# Altium PCB SupplyBox.PcbDoc
Units mil, origin at the board's own origin, x right, y up, seen from the top; angles counter-clockwise.
Board outline 6000 x 4000 mil, 2 copper layers (Top Layer, Bottom Layer); 8 components, 0 nets, 193 pads, 0 vias.
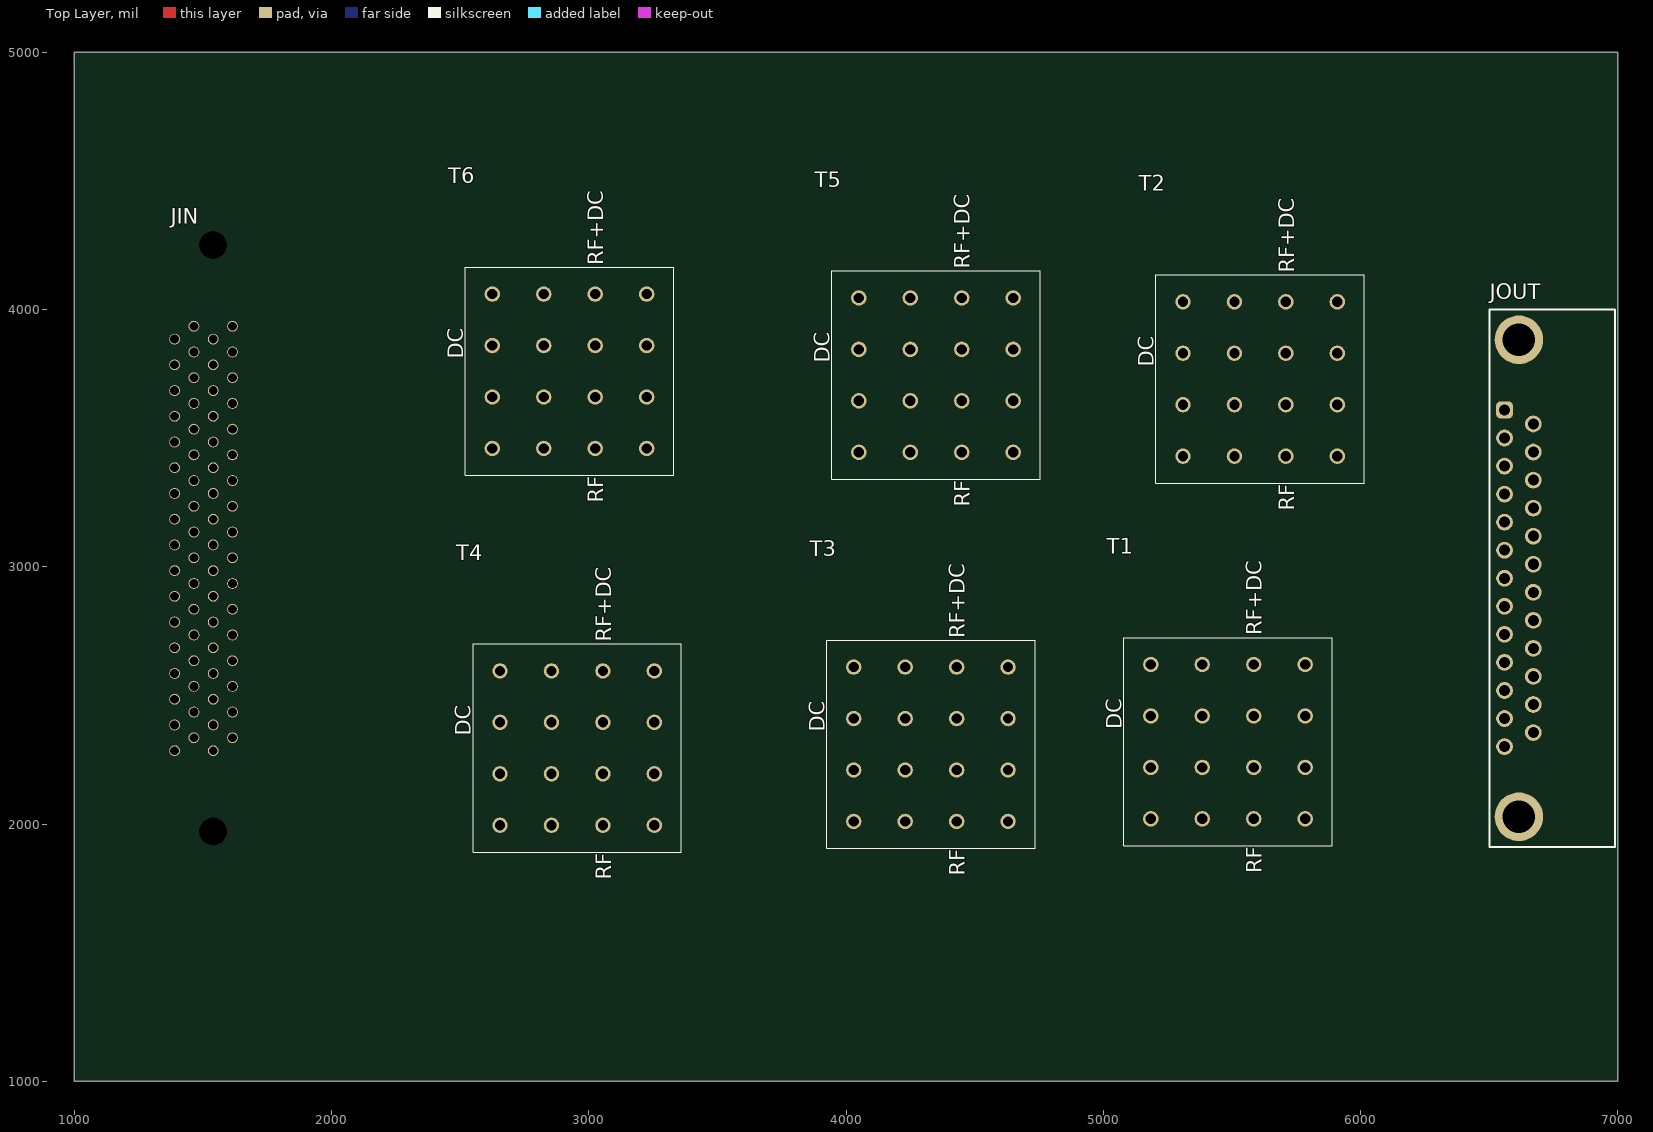
[diagram p0: Top Layer view]
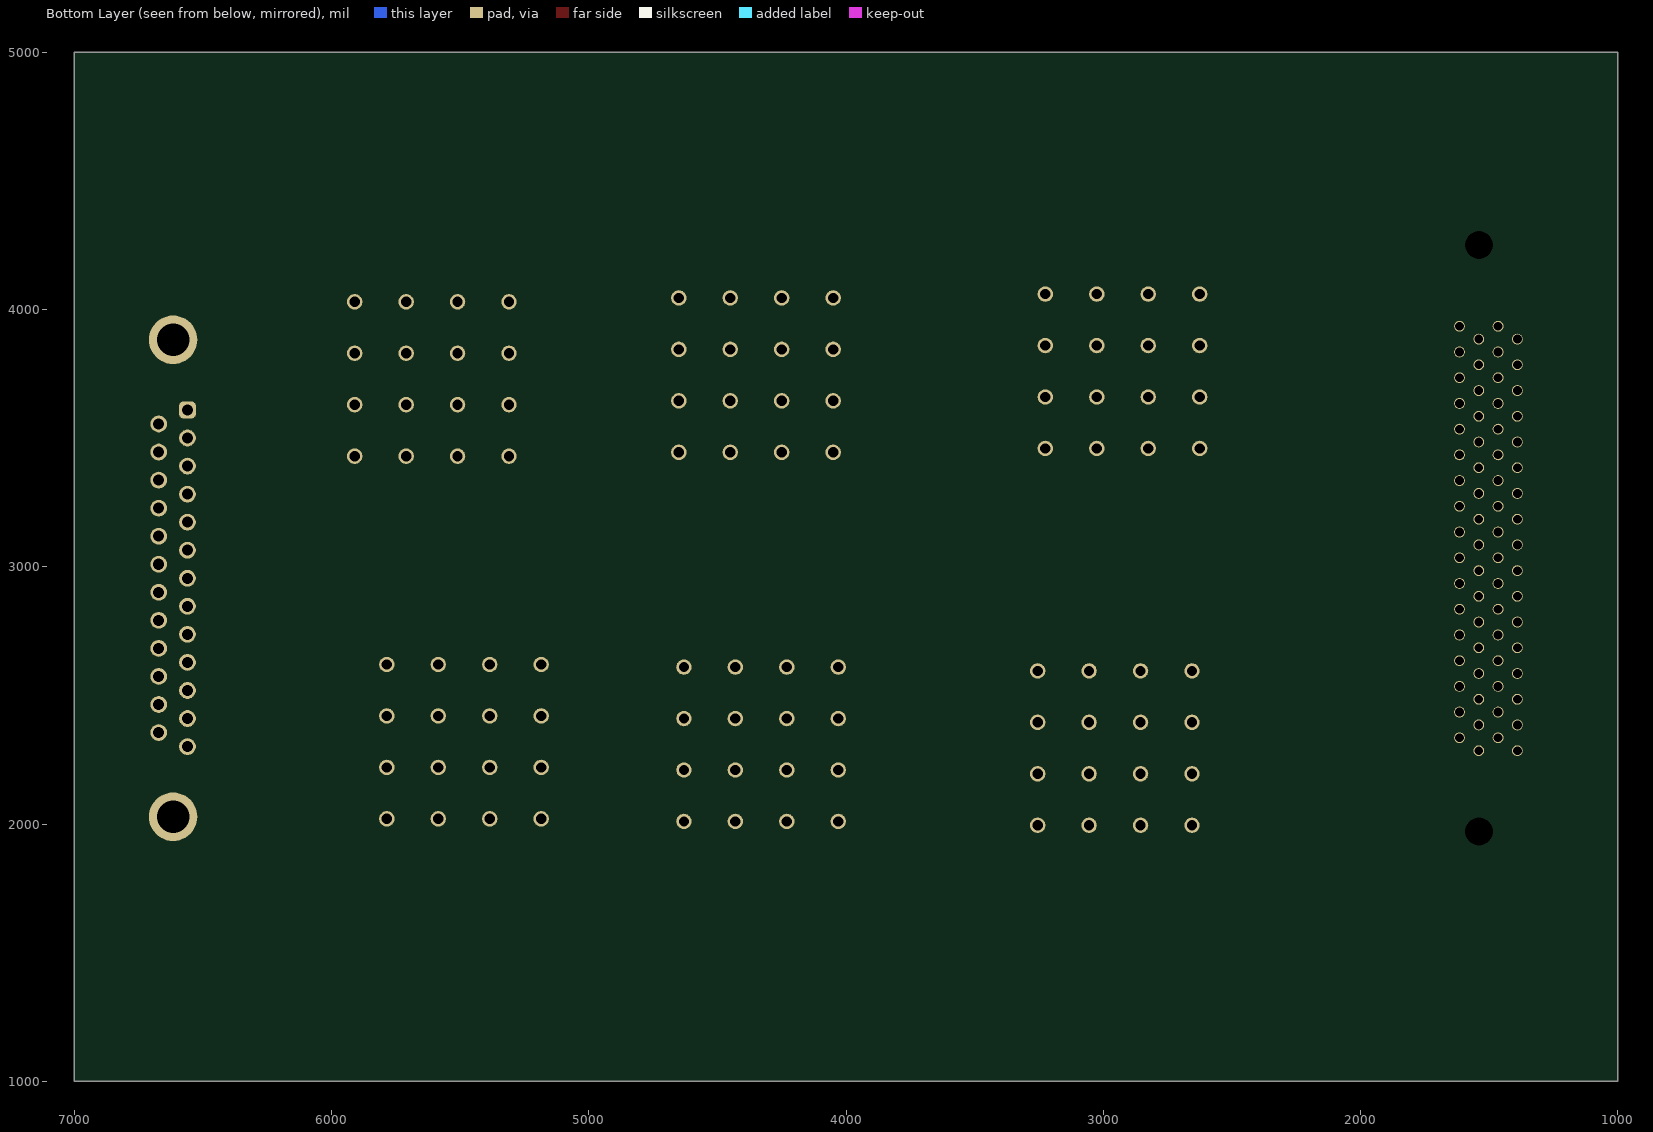
[diagram p1: Bottom Layer view, seen from below]

## Layer stack, top to bottom
Top Solder: solder mask 0.4, Solder Resist, Dk 3.5
Top Layer: signal copper 1.4
Dielectric 1: dielectric 12.6, FR-4, Dk 4.8
Bottom Layer: signal copper 1.4
Bottom Solder: solder mask 0.4, Solder Resist, Dk 3.5

## Board outline
1000,1000 7000,1000 7000,5000 1000,5000

## Design rules (kind name [scope] priority, off if disabled: settings)
Clearance [All] p1: gap=10 ignorepadtopadclearanceinfootprint=FALSE
PolygonConnect [All] p1: connectstyle=Relief reliefconductorwidth=10 reliefentries=4 polygonreliefangle="90 Angle" airgapwidth=10
RoutingVias [All] p1: holewidth=28 width=50 viastyle="Through Hole" minholewidth=28 minwidth=50 maxholewidth=28 maxwidth=50
SolderMaskExpansion [All] p1: expansion=4 istentingtop=FALSE
Width [All] p1: maxlimit=10 minlimit=10 preferedwidth=10
30 further rules are at their usual default settings.

## Components (designator, comment, footprint, x,y, rotation, side; value= is the part's Value field where it differs from the comment)
JIN "1761028-4" 1761028-4-Footprint-1 1465,3935 r90 top
JOUT "618025231121" 618025231121 6745.83,2955.28 r90 top
T1 "PBTC-1GW+" PBTC-1GW+ 5485,2320 r90 top
T2 "PBTC-1GW+" PBTC-1GW+ 5610,3730 r90 top
T3 "PBTC-1GW+" PBTC-1GW+ 4330,2310 r90 top
T4 "PBTC-1GW+" PBTC-1GW+ 2955,2295 r90 top
T5 "PBTC-1GW+" PBTC-1GW+ 4350,3745 r90 top
T6 "PBTC-1GW+" PBTC-1GW+ 2925,3760 r90 top

## Footprints (in the part's own frame and the unit in brackets; to place one, negate y for a bottom-side part, rotate by r counter-clockwise, add the part's x,y. Pads: shape width x height; smd on the part's side, far side on the other; paste and mask are expansions set on the pad)
1761028-4-Footprint-1 [mil]
  round 42 hole 34: 1(0,0) 2(-50,75) 3(-100,0) 4(-150,75) 5(-200,0) 6(-250,75) 7(-300,0) 8(-350,75) 9(-400,0) 10(-450,75) 11(-500,0) 12(-550,75) 13(-600,0) 14(-650,75) 15(-700,0) 16(-750,75) 17(-800,0) 18(-850,75) 19(-900,0) 20(-950,75) 21(-1000,0) 22(-1050,75) 23(-1100,0) 24(-1150,75) 25(-1200,0) 26(-1250,75) 27(-1300,0) 28(-1350,75) 29(-1400,0) 30(-1450,75) 31(-1500,0) 32(-1550,75) 33(-1600,0) 34(-1650,75) 35(0,-150) 36(-50,-75) 37(-100,-150) 38(-150,-75) 39(-200,-150) 40(-250,-75) 41(-300,-150) 42(-350,-75) 43(-400,-150) 44(-450,-75) 45(-500,-150) 46(-550,-75) 47(-600,-150) 48(-650,-75) 49(-700,-150) 50(-750,-75) 51(-800,-150) 52(-850,-75) 53(-900,-150) 54(-950,-75) 55(-1000,-150) 56(-1050,-75) 57(-1100,-150) 58(-1150,-75) 59(-1200,-150) 60(-1250,-75) 61(-1300,-150) 62(-1350,-75) 63(-1400,-150) 64(-1450,-75) 65(-1500,-150) 66(-1550,-75) 67(-1600,-150) 68(-1650,-75)
  round 100 hole 109 unplated: M1(315,-75) M2(-1965,-75)
618025231121 [mm] "25 pins, right angled, 8.08mm, with hex screw"
  rrect50% 1.65x1.65 hole 1.09: 1(16.62,4.72)
  round 1.65 hole 1.09: 2(13.85,4.72) 3(11.08,4.72) 4(8.31,4.72) 5(5.54,4.72) 6(2.77,4.72) 7(0,4.72) 8(-2.77,4.72) 9(-5.54,4.72) 10(-8.31,4.72) 11(-11.08,4.72) 12(-13.85,4.72) 13(-16.62,4.72) 14(15.235,1.88) 15(12.465,1.88) 16(9.695,1.88) 17(6.925,1.88) 18(4.155,1.88) 19(1.385,1.88) 20(-1.385,1.88) 21(-4.155,1.88) 22(-6.925,1.88) 23(-9.695,1.88) 24(-12.465,1.88) 25(-15.235,1.88)
  round 4.8 hole 3.2: M1(-23.55,3.3) M2(23.55,3.3)
  silkscreen extent -26.55,-6.2 26.55,6.2, body extent -26.55,-12.2 26.55,6.2, height 12.55
PBTC-1GW+ [mil] "Mini-Circuits Bias-Tee"
  round 60 hole 40: 1(-300,300) 2(-100,300) 3(100,300) 4(300,300) 5(-300,100) 6(-100,100) 7(100,100) 8(300,100) 9(-300,-100) 10(-100,-100) 11(100,-100) 12(300,-100) 13(-300,-300) 14(-100,-300) 15(100,-300) 16(300,-300)
  silkscreen extent -405,-405 405,405

## Part data
JIN: library part CMP-002-00071-1, "Telecom and Datacom Connector, 68 Contact(s), Female, Right Angle, Solder Terminal, #2-56, Receptacle", Max Operating Temperature=105°C, Min Operating Temperature=-55°C, Connector Type="TELECOM AND DATACOM CONNECTOR", Mounting Technology=Panel,Board, RoHS Compliant=Yes
JOUT: library part CMP-1502-00202-2, Contact Resistance=30mΩ, Current Rating=3A, Insulation Resistance=5GΩ, Max Operating Temperature=105°C, Min Operating Temperature=-55°C, Operating Supply Voltage=125V, Contact Plating=Gold, Depth=18.5mm, Gender=Female, Housing Material=Steel, Insulation Material=PBT, Length=38.33mm, Mount="Through Hole", NexarPartId=18818207, Number of Contacts=25, Number of Pins=25, Number of Rows=2, Orientation="Right Angle", Pitch=2.77mm, REACH SVHC=Unknown, RoHS=Compliant, Termination=SMD/SMT, Voltage Rating=125V, Width=12.5mm
T1 T2 T3 T4 T5 T6: library part CMP-00025-00003-1, "Monitor TEE DC Block, 0.1MHz Min, 1000MHz Max, 1dB Insertion Loss-Max", Max Operating Temperature=100°C, Min Operating Temperature=-55°C, RoHS Compliant=Yes

## Nets (pads, with @x,y where several pads share a name; then routed paths per layer and width w, separated by ;. In a path a pad name is that pad's centre, name@x,y a point inside that pad or via, vN(x,y) a via of type N, cw(c..) or ccw(c..) an arc to the next point about the centre after c; other vN are vias at no path point)
pads on no net: JIN.1 JIN.2 JIN.3 JIN.4 JIN.5 JIN.6 JIN.7 JIN.8 JIN.9 JIN.10 JIN.11 JIN.12 JIN.13 JIN.14 JIN.15 JIN.16 JIN.17 JIN.18 JIN.19 JIN.20 JIN.21 JIN.22 JIN.23 JIN.24 JIN.25 JIN.26 JIN.27 JIN.28 JIN.29 JIN.30 JIN.31 JIN.32 JIN.33 JIN.34 JIN.35 JIN.36 JIN.37 JIN.38 JIN.39 JIN.40 JIN.41 JIN.42 JIN.43 JIN.44 JIN.45 JIN.46 JIN.47 JIN.48 JIN.49 JIN.50 JIN.51 JIN.52 JIN.53 JIN.54 JIN.55 JIN.56 JIN.57 JIN.58 JIN.59 JIN.60 JIN.61 JIN.62 JIN.63 JIN.64 JIN.65 JIN.66 JIN.67 JIN.68 JIN.M1 JIN.M2 JOUT.1 JOUT.2 JOUT.3 JOUT.4 JOUT.5 JOUT.6 JOUT.7 JOUT.8 JOUT.9 JOUT.10 JOUT.11 JOUT.12 JOUT.13 JOUT.14 JOUT.15 JOUT.16 JOUT.17 JOUT.18 JOUT.19 JOUT.20 JOUT.21 JOUT.22 JOUT.23 JOUT.24 JOUT.25 JOUT.M1 JOUT.M2 T1.1 T1.2 T1.3 T1.4 T1.5 T1.6 T1.7 T1.8 T1.9 T1.10 T1.11 T1.12 T1.13 T1.14 T1.15 T1.16 T2.1 T2.2 T2.3 T2.4 T2.5 T2.6 T2.7 T2.8 T2.9 T2.10 T2.11 T2.12 T2.13 T2.14 T2.15 T2.16 T3.1 T3.2 T3.3 T3.4 T3.5 T3.6 T3.7 T3.8 T3.9 T3.10 T3.11 T3.12 T3.13 T3.14 T3.15 T3.16 T4.1 T4.2 T4.3 T4.4 T4.5 T4.6 T4.7 T4.8 T4.9 T4.10 T4.11 T4.12 T4.13 T4.14 T4.15 T4.16 T5.1 T5.2 T5.3 T5.4 T5.5 T5.6 T5.7 T5.8 T5.9 T5.10 T5.11 T5.12 T5.13 T5.14 T5.15 T5.16 T6.1 T6.2 T6.3 T6.4 T6.5 T6.6 T6.7 T6.8 T6.9 T6.10 T6.11 T6.12 T6.13 T6.14 T6.15 T6.16

## Text inside footprints (layer, text, board x,y; h text height)
JOUT: Mechanical 2 "PCB Edge" at 7043.07,2971.02 h40 r90
T1: Top Overlay "RF+DC" at 5617,2733 h60 r90; Top Overlay "DC" at 5072,2368 h60 r90; Top Overlay "RF" at 5617,1808 h60 r90
T2: Top Overlay "RF+DC" at 5742,4143 h60 r90; Top Overlay "DC" at 5197,3778 h60 r90; Top Overlay "RF" at 5742,3218 h60 r90
T3: Top Overlay "RF+DC" at 4462,2723 h60 r90; Top Overlay "DC" at 3917,2358 h60 r90; Top Overlay "RF" at 4462,1798 h60 r90
T4: Top Overlay "RF+DC" at 3087,2708 h60 r90; Top Overlay "DC" at 2542,2343 h60 r90; Top Overlay "RF" at 3087,1783 h60 r90
T5: Top Overlay "RF+DC" at 4482,4158 h60 r90; Top Overlay "DC" at 3937,3793 h60 r90; Top Overlay "RF" at 4482,3233 h60 r90
T6: Top Overlay "RF+DC" at 3057,4173 h60 r90; Top Overlay "DC" at 2512,3808 h60 r90; Top Overlay "RF" at 3057,3248 h60 r90